# Altium PCB switches.PcbDoc
Units mil, origin at the board's own origin, x right, y up, seen from the top; angles counter-clockwise.
Board outline 1900 x 1100 mil, 2 copper layers (Top Layer, Bottom Layer), stack 65.792 mil thick; 14 components, 13 nets, 34 pads, 0 vias.
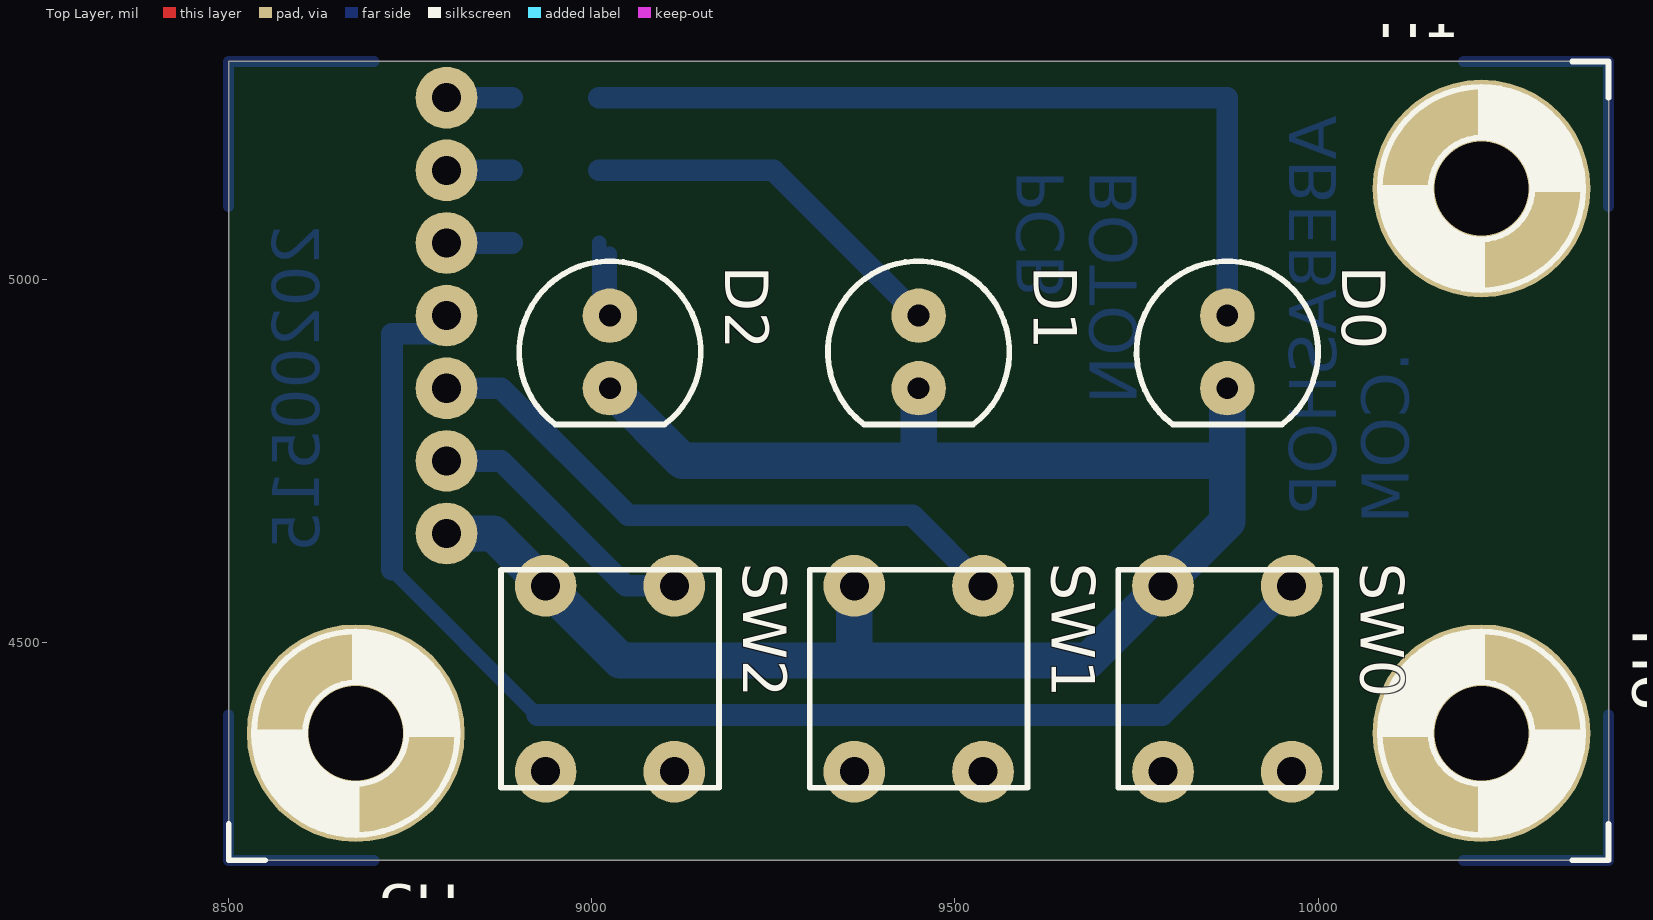
[diagram p0: Top Layer view]
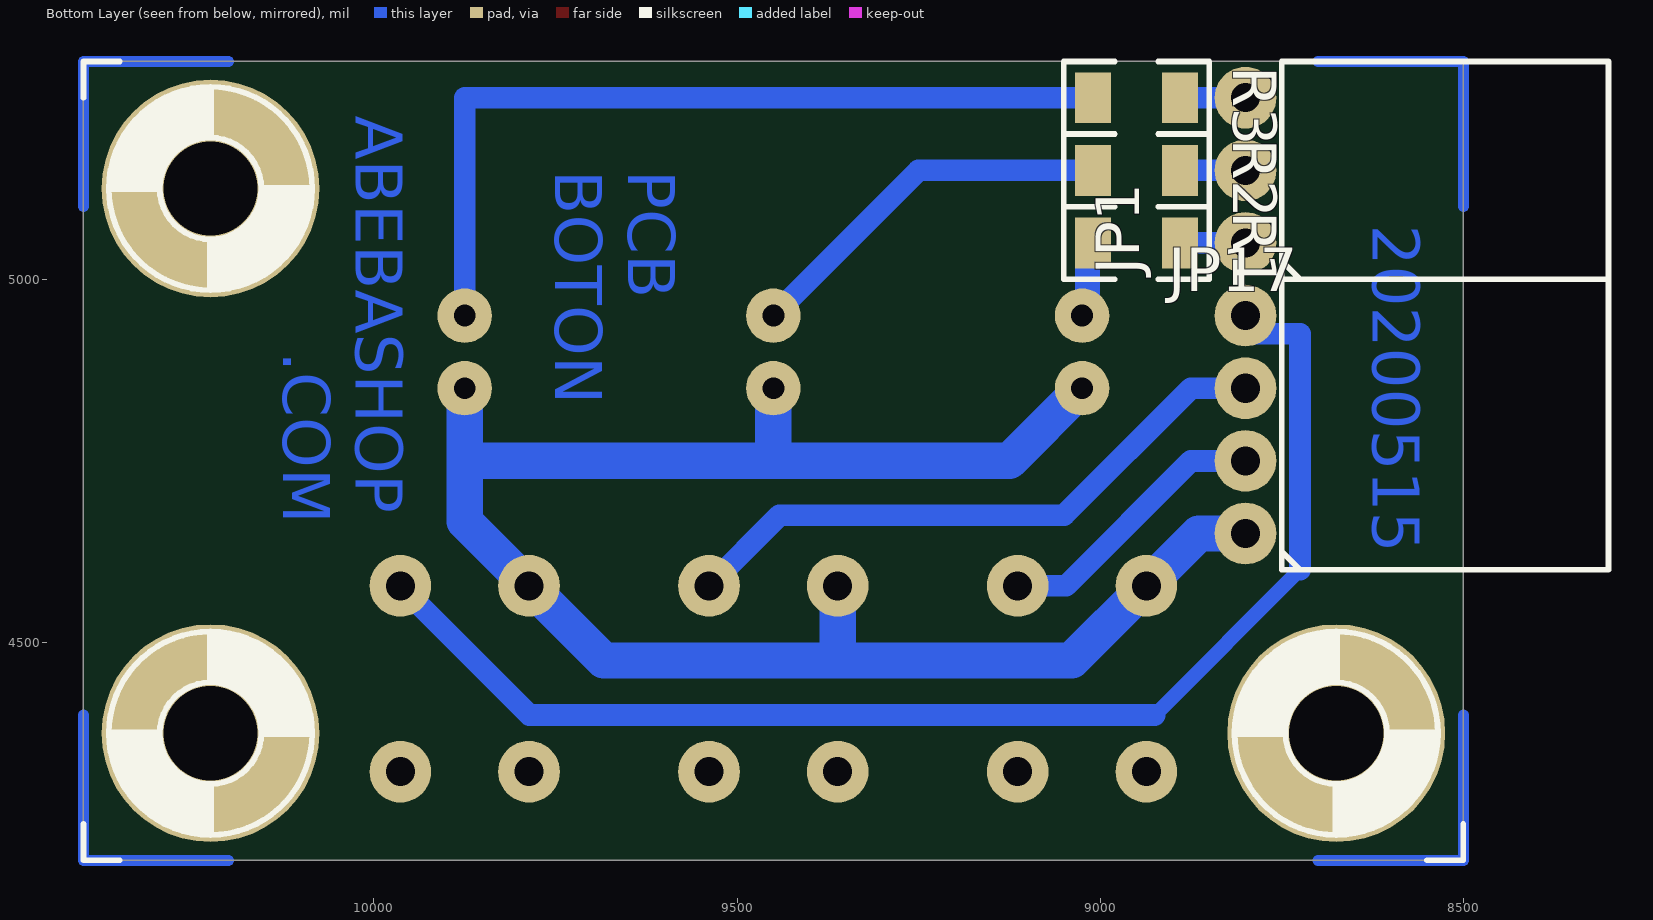
[diagram p1: Bottom Layer view, seen from below]
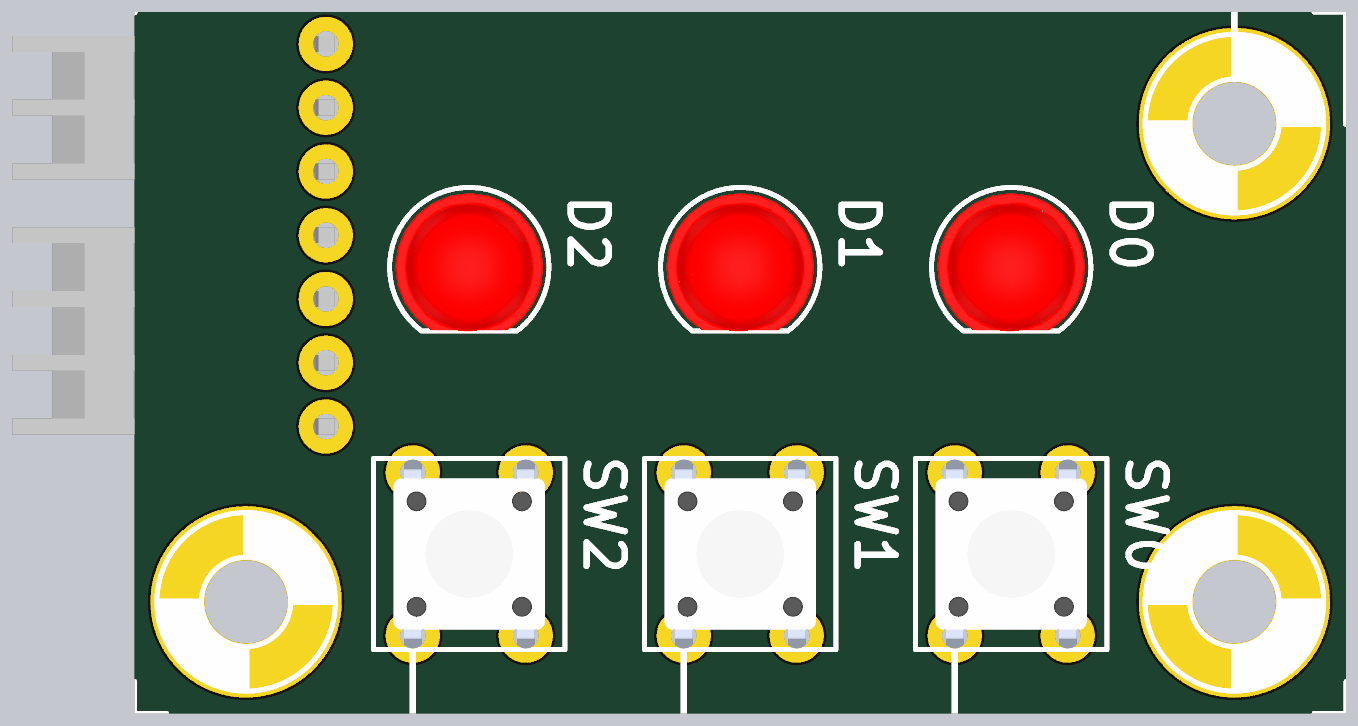
[diagram p2: 3D render of the assembled board from above, using the file's embedded part models]

## Layer stack, top to bottom
Top Layer: signal copper 1.4
Dielectric: core 62.9921, FR-4, Dk 4.8
Bottom Layer: signal copper 1.4

## Board outline
8500,4200 10400,4200 10400,5300 8500,5300

## Design rules (kind name [scope] priority, off if disabled: settings)
Clearance [All] p1: gap=10
PolygonConnect [All] p1: connectstyle=Relief reliefconductorwidth=10 reliefentries=4 polygonreliefangle="90 Angle"
RoutingVias [All] p1: holewidth=28 width=50 viastyle="Through Hole" minholewidth=28 minwidth=50 maxholewidth=28 maxwidth=50
SilkscreenOverComponentPads [All] p1: minsilkscreentomaskgap=10
SolderMaskExpansion [All] p1: expansion=4
Width [All] p1: maxlimit=100 minlimit=10 preferedwidth=10
27 further rules are at their usual default settings.

## Components (designator, comment, footprint, x,y, rotation, side; value= is the part's Value field where it differs from the comment)
D0 "Led 5mm Rojo Difuso" "LED5mm ROJO" 9875,4900 r270 top
D1 "Led 5mm Rojo Difuso" "LED5mm ROJO" 9450,4900 r270 top
D2 "Led 5mm Rojo Difuso" "LED5mm ROJO" 9025,4900 r270 top
H1 "Agujero de Montaje" agujero 10225,5125 r0 top
H5 "Agujero de Montaje" agujero 8675,4375 r180 top
H6 "Agujero de Montaje" agujero 10225,4375 r270 top
JP1 "Header3x1" CONPOL3X1_90 8800,5100 r90 bottom
JP17 "Header4x1" CONPOL4X1_90 8800,4650 r90 bottom
R1 "Res" 1206NP 8950,5050 r180 bottom
R2 "Res" 1206NP 8950,5150 r180 bottom
R3 "Res" 1206NP 8950,5250 r180 bottom
SW0 "SW_T_5MM" SW_T_8MM 9875,4450 r270 top
SW1 "SW_T_5MM" SW_T_8MM 9450,4450 r270 top
SW2 "SW_T_5MM" SW_T_8MM 9025,4450 r270 top

## Footprints (in the part's own frame and the unit in brackets; to place one, negate y for a bottom-side part, rotate by r counter-clockwise, add the part's x,y. Pads: shape width x height; smd on the part's side, far side on the other; paste and mask are expansions set on the pad)
1206NP [mil]
  rect 50x70 smd: 1(-60,0) 2(60,0)
  silkscreen extent -100,-50 100,50
agujero [mil] "AGUJERO DE MONTAJE"
  round 300 hole 130: 1(0,0)
  silkscreen extent -140,-140 175,175
CONPOL3X1_90 [mil] "CONECTOR POLARIZADO 3x1"
  round 85 hole 40: 1(-50,0) 2(50,0) 3(150,0)
  silkscreen extent -100,-500 200,-50, body extent -100,-491 200,14, height 250
CONPOL4X1_90 [mil]
  round 85 hole 40: 1(0,0) 2(100,0) 3(200,0) 4(300,0)
  silkscreen extent -50,-500 350,-50, body extent -50,-491 350,14, height 250
"LED5mm ROJO" [mil] "LED 5MM"
  round 75 hole 30: 1(-50,0) 2(50,0)
  silkscreen extent -125,-125 100,125, body extent -116,-116 99,116, height 339
SW_T_8MM [mil] "PULSADOR DE 2 CONTACTOS, 4 TERMINALES"
  round 85 hole 40: 1(127.95,-88.58) 2(127.95,88.58) 3(-127.95,-88.58) 4(-127.95,88.58)
  silkscreen extent -150,-150 150,150, body extent -152,-119 152,119, height 319

## Part data
JP1: "Header 3x1"
JP17: "Header 4x1"
R1 R2 R3: "Resistor"

## Nets (pads, with @x,y where several pads share a name; then routed paths per layer and width w, separated by ;. In a path a pad name is that pad's centre, name@x,y a point inside that pad or via, vN(x,y) a via of type N, cw(c..) or ccw(c..) an arc to the next point about the centre after c; other vN are vias at no path point)
"BUS CS1": JP1.1 R1.2 | length 90
  Bottom Layer w30: JP1.1 R1.2
"BUS CS2": JP1.2 R2.2 | length 90
  Bottom Layer w30: JP1.2 R2.2
"BUS CS3": JP1.3 R3.2 | length 90
  Bottom Layer w30: JP1.3 R3.2
GND: D0.2 D1.2 D2.2 JP17.1 SW0.3 SW1.3 SW2.3 | length 2504.7
  Bottom Layer w50: JP17.1 8864.37,4650 SW2.3 9039.37,4475 9361.42,4475 ; D2.2 9125,4750 9875,4750 ; SW1.3 9361.42,4475 ; 9450,4750 D1.2 ; D0.2 9875,4750 ; 9361.42,4475 9511.42,4475 9683.46,4475 SW0.3 9875,4666.54 9875,4750
NetD0_1: D0.1 R3.1 | length 1165
  Bottom Layer w30: R3.1 9875,5250 9875,5100 D0.1
NetD1_1: D1.1 R2.1 | length 522.8
  Bottom Layer w30: R2.1 9250,5150 D1.1
NetD2_1: D2.1 R1.1 | length 170
  Bottom Layer w20: D2.1@9010,4965 R1.1 ; D2.1 R1.1@9025,5035
SW0: JP17.4 SW0.4 | length 2195.1
  Bottom Layer w20: JP17.4@8800,4925 8725,4925 8725,4600 8925,4400
  Bottom Layer w30: 8725,4600 8725,4925 JP17.4@8800,4925 ; 8925,4400 9785.63,4400 SW0.4
SW0_: SW0.2
SW1: JP17.3 SW1.4 | length 876.3
  Bottom Layer w30: JP17.3@8775,4850 8875,4850 9050,4675 9441.54,4675 SW1.4
SW1_: SW1.2
SW2: JP17.2 SW2.4 | length 409.8
  Bottom Layer w30: JP17.2@8775,4750 8875,4750 9047.05,4577.95 SW2.4
SW2_: SW2.2
pads on no net: H1.1 H5.1 H6.1 SW0.1 SW1.1 SW2.1
copper on no net: | length 1600
  Bottom Layer w15: 8500,4400 8500,4200 8700,4200 ; 8500,5100 8500,5300 8700,5300 ; 10200,4200 10400,4200 10400,4400 ; 10200,5300 10400,5300 10400,5100

## Other copper
Bottom Layer:
  text "ABEBASHOP" at 10025,5225 h65 r90
  text "PCB" at 9650,5150 h65 r90
  text "BOTON" at 9750,5150 h65 r90
  text "20200515" at 8625,5075 h65 r90
  text ".COM" at 10125,4900 h65 r90

## Dimensions
9361.42,4577.95 to 9786.42,4577.95 on Top Overlay
8500,4200 to 10400,4200 on Top Overlay
8936.42,4577.95 to 9361.42,4577.95 on Top Overlay
8500,4200 to 8500,5300 on Top Overlay
8500,5300 to 10225,5125 on Top Overlay
10225,5125 to 10400,5300 on Top Overlay